# Altium PCB wallswitch.PcbDoc
Units mm, origin at the board's own origin, x right, y up, seen from the top; angles counter-clockwise.
Board outline 61 x 61 mm, 2 copper layers (Top Layer, Bottom Layer); 60 components, 71 nets, 191 pads, 137 vias.
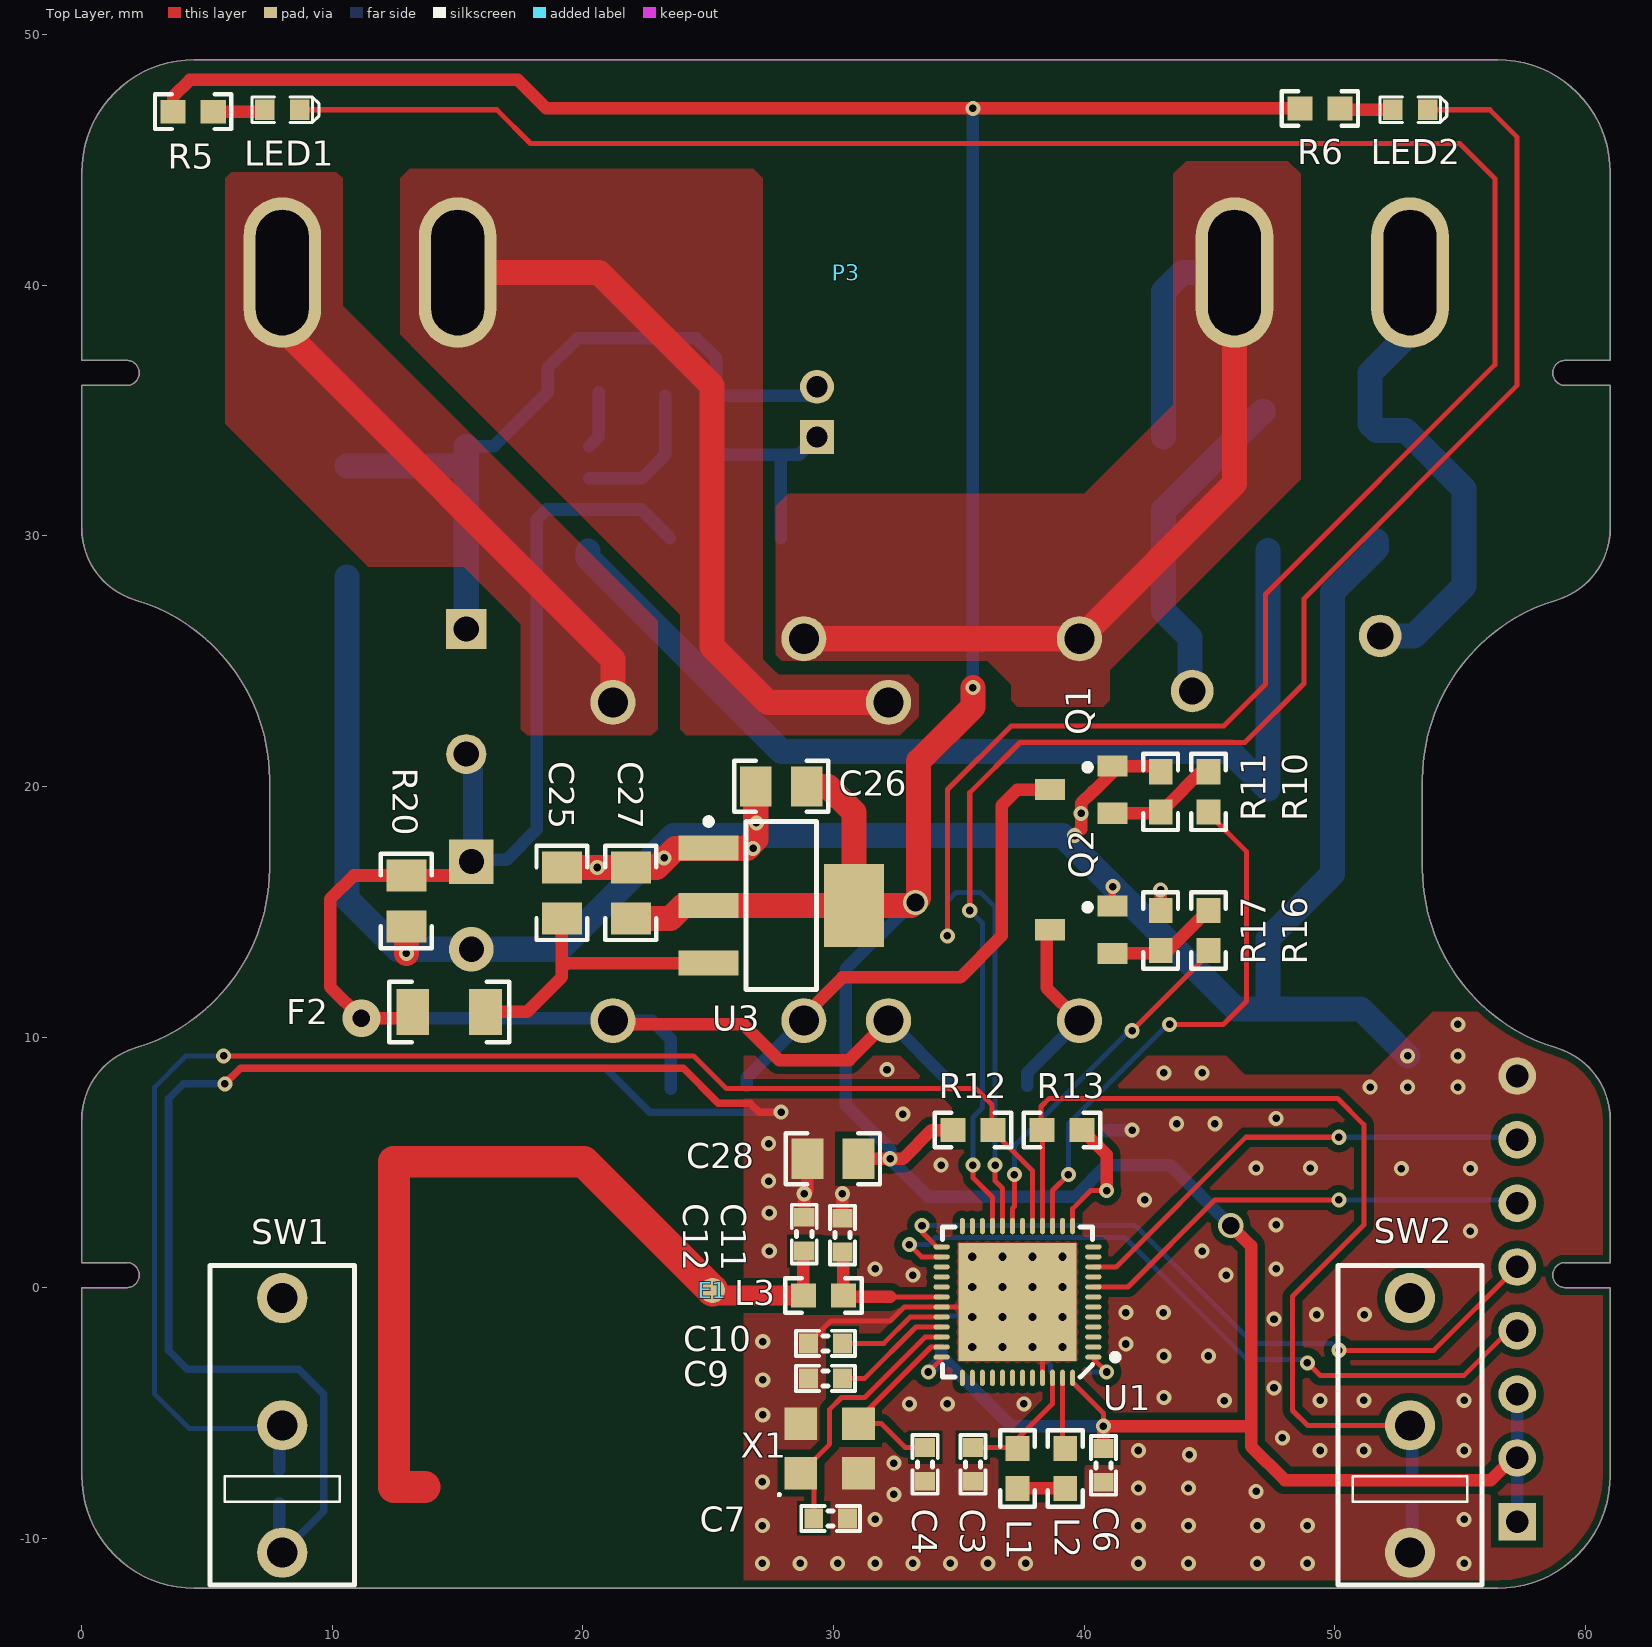
[diagram p0: Top Layer view]
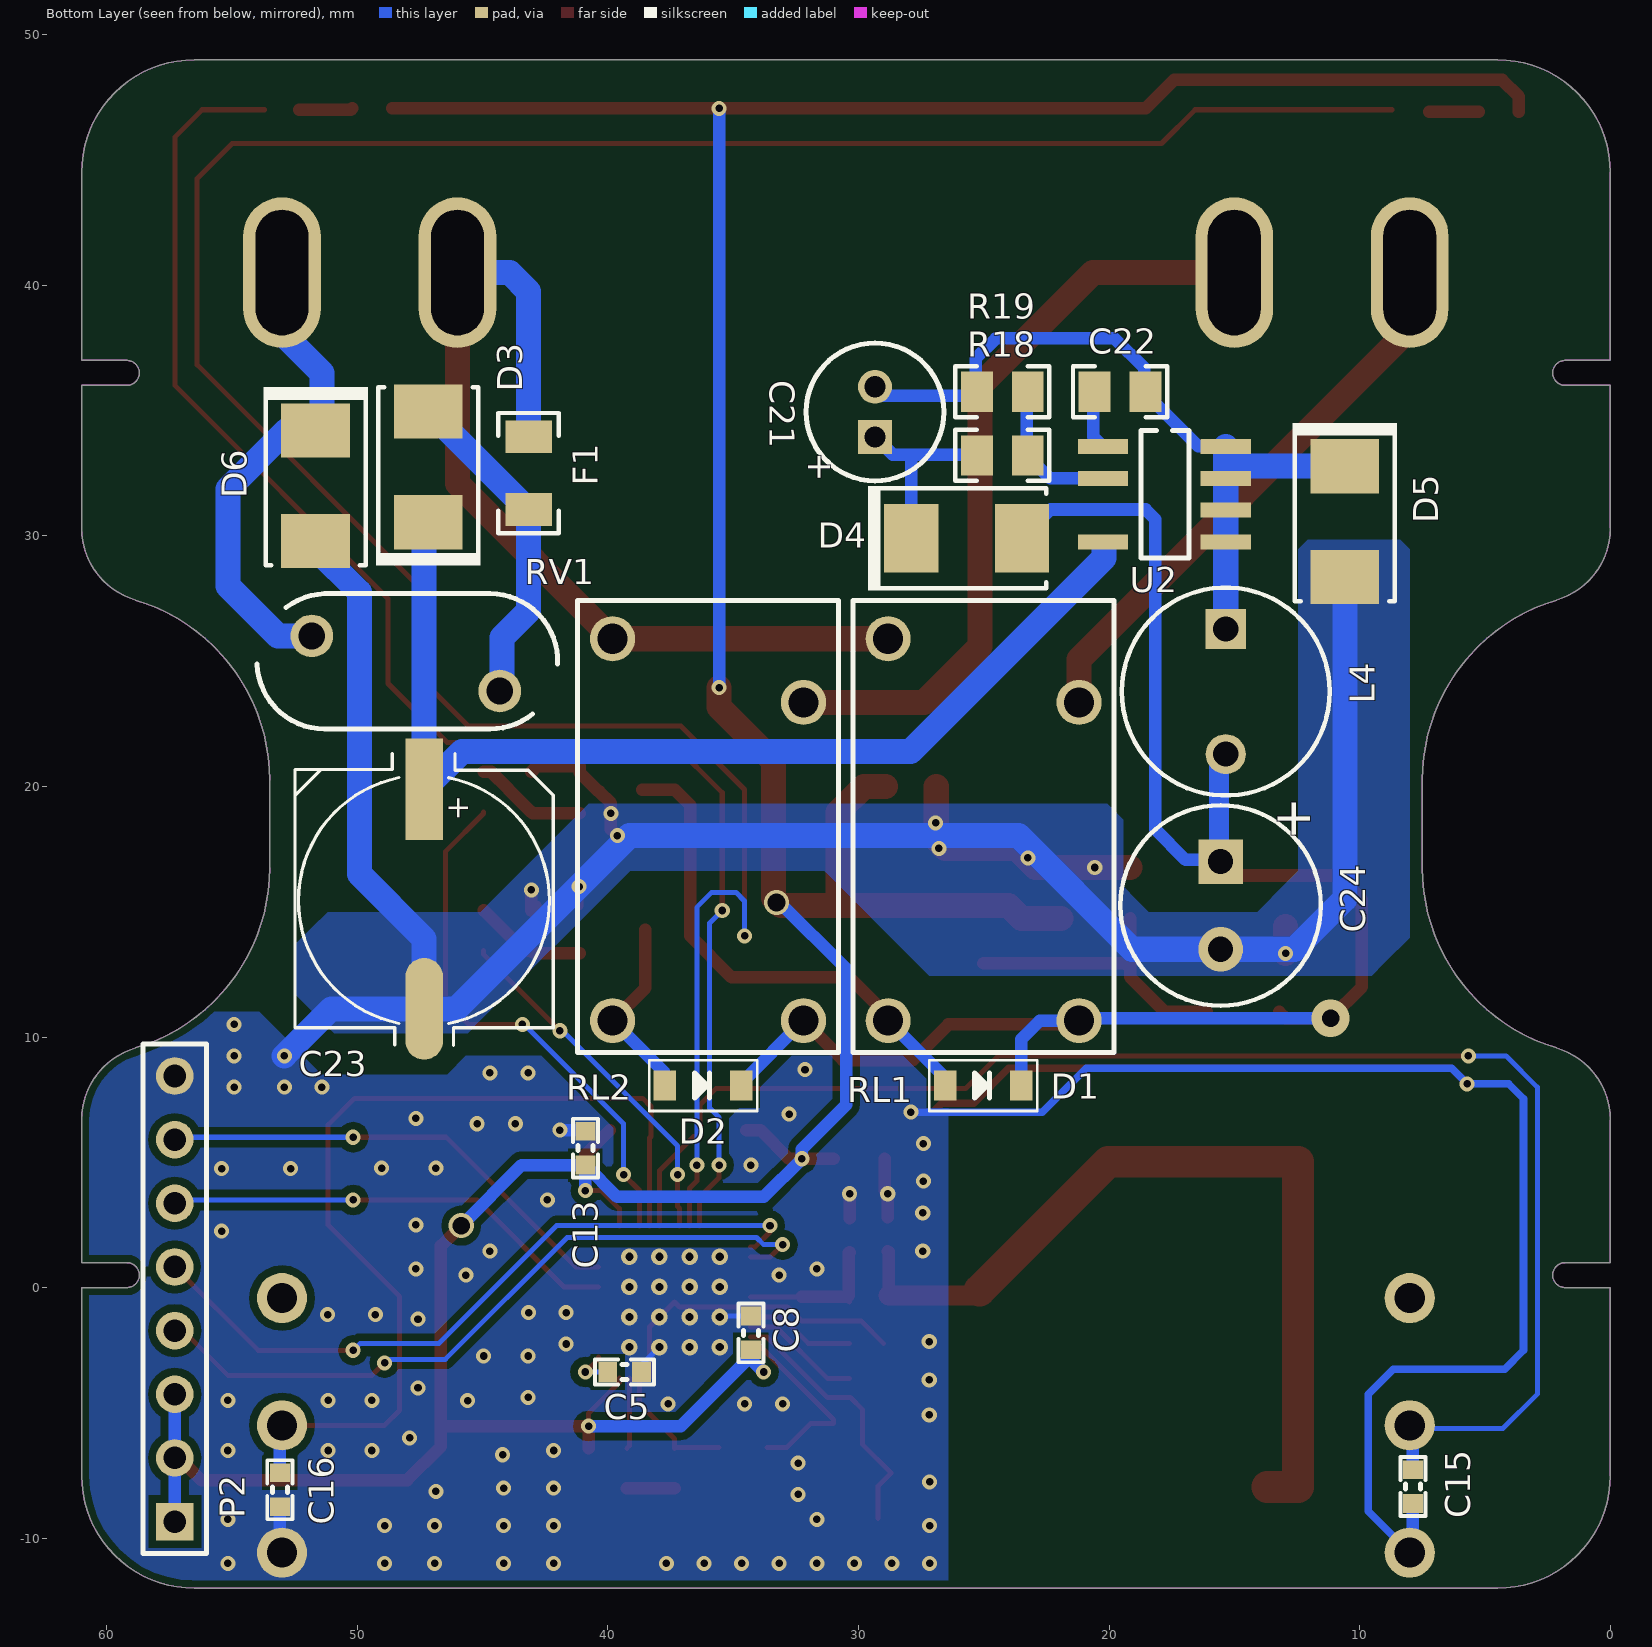
[diagram p1: Bottom Layer view, seen from below]
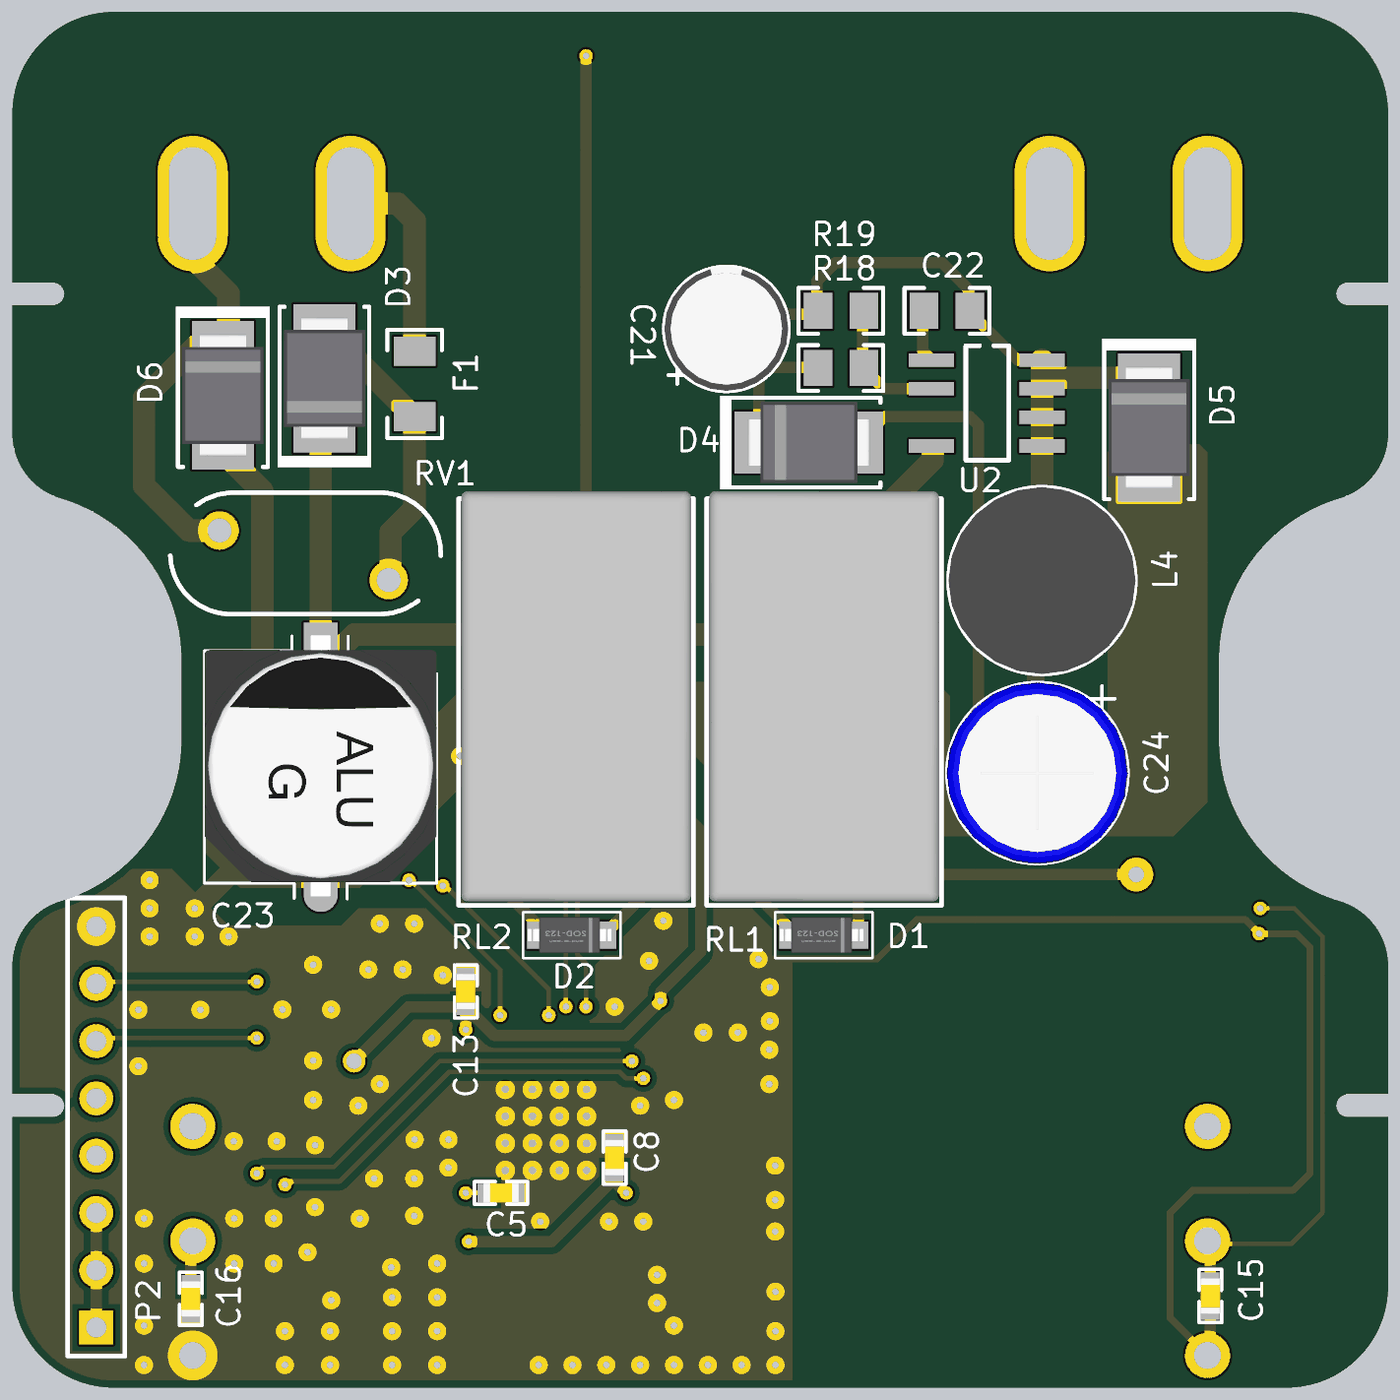
[diagram p2: 3D render of the assembled board from below, using the file's embedded part models]

## Layer stack, top to bottom
Top Solder: solder mask 0.0102, Solder Resist, Dk 3.5
Top Layer: signal copper 0.0356
Dielectric 1: dielectric 0.32, FR-4, Dk 4.8
Bottom Layer: signal copper 0.0356
Bottom Solder: solder mask 0.0102, Solder Resist, Dk 3.5

## Board outline
0,0 1.8,0 ccw(c1.8,0.5) 1.8,1 0,1 0,6.688 cw(c3,6.688) 2.143,9.563 ccw(c0,16.75) 7.5,16.75 7.5,20.25 ccw(c0,20.25) 2.143,27.437 cw(c3,30.312) 0,30.312 0,36 1.8,36 ccw(c1.8,36.5) 1.8,37 0,37 0,44.5 cw(c4.5,44.5) 4.5,49 56.5,49 cw(c56.5,44.5) 61,44.5 61,37 59.2,37 ccw(c59.2,36.5) 59.2,36 61,36 61,30.312 cw(c58,30.312) 58.857,27.437 ccw(c61,20.25) 53.5,20.25 53.5,16.75 ccw(c61,16.75) 58.857,9.563 cw(c58,6.688) 61,6.688 61,1 59.2,1 ccw(c59.2,0.5) 59.2,0 61,0 61,-7.5 cw(c56.5,-7.5) 56.5,-12 54.996,-12 10.165,-12 4.5,-12 cw(c4.5,-7.5) 0,-7.5

## Design rules (kind name [scope] priority, off if disabled: settings)
Clearance [All] p1: gap=0.2
HoleSize [All] p1: absolutevalues=TRUE maxlimit=10 minlimit=0.025 maxpercent=80.000 minpercent=20.000
MinimumSolderMaskSliver [All] p1: minsoldermaskwidth=0.01
PolygonConnect [All] p1: connectstyle=Direct reliefconductorwidth=0.254 reliefentries=4 polygonreliefangle="90 Angle" airgapwidth=0.254
RoutingVias [All] p1: holewidth=0.711 width=1.27 viastyle="Through Hole" minholewidth=0.3 minwidth=0.3 maxholewidth=5 maxwidth=5
SilkToSilkClearance [All] p1: silktosilkclearance=0.127
SilkToSolderMaskClearance [IsPad] p1: minsilkscreentomaskgap=0.01 clearancetoexposedcopper=TRUE
SolderMaskExpansion [All] p1: expansion=0.102
Width [All] p1: maxlimit=2 minlimit=0.2 preferedwidth=0.254
26 further rules are at their usual default settings.

## Classes and differential pairs
component class pca10040_sheet1_radio: C3 C4 C5 C6 C7 C8 C9 C10 C11 C12 C13 C42 C43 E1 L1 L2 L3 P2 P23 R25 R26 R27 R28 SB1 SB2 SB3 SB4 U1 X1
component class pca10040_sheet3_buttons_and_leds: C15 C16 C44 C45 C46 C47 C48 C49 C50 C51 D1 D2 LED1 LED2 Q1 Q2 R1 R2 R3 R4 R5 R6 R10 R11 R12 R13 R16 R17 R29 R30 R31 R32 R33 R34 R35 R36 R37 R38 R40 R41 R42 R43 RL1 RL2 SB5 SB6 SB7 SB8 SB30 SW1 SW2 SW5
component class pca10040_sheet5_power_supply: Bat1 C17 C18 C21 C22 C23 C24 C25 C26 C27 C28 D3 D4 D5 D6 F1 F2 L4 P3 P21 P22 R18 R19 R20 RV1 SB9 SB10 SB11 SB12 SW6 TP12 TP13 TP14 U2 U3

## Components (designator, comment, footprint, x,y, rotation, side; value= is the part's Value field where it differs from the comment)
C3 "1.0µF" CAPC1608X06L 35.565,-7.05 r90 top
C4 "12pF" CAPC1608X06L 33.66,-7.05 r270 top
C5 "100nF" CAPC1608X06L 39.335,-3.367 r180 bottom
C6 "4.7µF" CAPC1608X06L 40.772,-7.09 r270 top
C7 "12pF" CAPC1608X06L 29.89,-9.209 r0 top
C8 "100nF" CAPC1608X06L 34.295,-1.803 r90 bottom
C9 "100pF" CAPC1608X06L 29.683,-3.621 r180 top
C10 "N.C." CAPC1608X06L 29.683,-2.224 r180 top
C11 "0.8pF" CAPC1608X06L 30.358,2.094 r270 top
C12 "1.2pF" CAPC1608X06L 28.834,2.134 r90 top
C13 "100nF" CAPC1608X06L 40.899,5.563 r90 bottom
C15 "1.0µF" CAPC1608X06L 7.879,-7.939 r270 bottom
C16 "1.0µF" CAPC1608X06L 53.091,-8.066 r90 bottom
C21 "ECA-1HHG100" NHG_500x1100 29.342,34.946 r90 bottom
C22 "104" 0805_HV 19.563,35.749 r0 bottom
C23 "400AX6R8M8x11" PANACAP-G-GENERIC 47.331,15.444 r270 bottom
C24 "400AX6R8M8x11" CAPPRD350W60D800H1100 15.55,15.251 r270 bottom locked
C25 "105" 0805_HV 19.165,15.75 r270 top
C26 "105" 0805_HV 27.915,20 r0 top
C27 "105" 0805_HV 21.915,15.75 r270 top
C28 "105" 0805_HV 29.977,5.142 r0 top
D1 "Diode SMD" DIO-SMD-123 25.024,8.063 r180 bottom
D2 "Diode SMD" DIO-SMD-123 36.2,8.063 r180 bottom
D3 "US1M-13-F" SMB 47.165,32.75 r270 bottom
D4 "US1M-13-F" SMB 25.684,29.907 r0 bottom
D5 "US1M-13-F" SMB 10.597,30.567 r90 bottom
D6 "US1M-13-F" SMB 51.665,32 r90 bottom
E1 "Antenna" "PCB ANTENNE" 19.944,-1.081 r0 top
F1 "Res" 1206 43.165,32.5 r270 bottom
F2 "Res" 1206 14.665,11 r0 top
L1 "15nH" 0603 37.343,-7.215 r270 top
L2 "10µH" 0603 39.248,-7.215 r90 top
L3 "3.9nH" 0603 29.596,-0.319 r180 top
L4 "7447480331" IND_WE-TI_8095 15.347,23.786 r270 bottom
LED1 "L0603G" LED_0603_G 8.006,47.001 r180 top
LED2 "L0603G" LED_0603_G 53.015,47.001 r180 top
P2 "Header 8" HDR1X8 57.282,-9.336 r90 bottom
P3 "Header 4" CONWALL_SWITH 8.005,40.503 r0 top locked
Q1 "C1815" SOT23B 39.883,19.874 r270 top
Q2 "C1815" SOT23B 39.883,14.286 r270 top
R5 "220R" 0603 4.45,46.925 r180 top
R6 "220R" 0603 49.408,47.052 r180 top
R10 "1K" 0603 44.963,19.785 r90 top
R11 "10K" 0603 43.058,19.785 r90 top
R12 "100k" 0603 35.565,6.285 r180 top
R13 "100k" 0603 39.121,6.285 r0 top
R16 "1K" 0603 44.963,14.248 r90 top
R17 "10K" 0603 43.058,14.248 r90 top
R18 "13k" 0805_HV 24.262,33.209 r0 bottom
R19 "2K" 0805_HV 24.262,35.749 r180 bottom
R20 "3k3" 0805_HV 12.959,15.429 r90 top
RL1 "Component_1" AZ7705 28.819,23.353 r180 bottom locked
RL2 "Component_1" AZ7705 39.815,23.353 r180 bottom locked
RV1 "S10K275E2" VAR_S10K275E2 48.004,24.99 r180 bottom
SW1 "PB SW" D2FC-F-7N 8.005,-5.497 r0 top locked
SW2 "PB SW" D2FC-F-7N 53.005,-5.497 r0 top locked
U1 "nRF52832-QFAA" QFN40P600X600X90-48N 37.343,-0.573 r180 top locked
U2 "LNK306" "SOP 7" 20.247,33.565 r180 bottom locked
U3 "AMS1117-3.3V SOT223 _MH" SOT223 27.915,15.25 r270 top
X1 "CX3225SB32000D0FFFCC" SON230P260X60-4N 29.85,-6.415 r90 top

## Footprints (in the part's own frame and the unit in brackets; to place one, negate y for a bottom-side part, rotate by r counter-clockwise, add the part's x,y. Pads: shape width x height; smd on the part's side, far side on the other; paste and mask are expansions set on the pad)
0603 [mm] "0603 from SM-752 data"
  rect 1x0.95 smd: 1(-0.8,0) 2(0.8,0)
  silkscreen extent -1.52,-0.69 1.52,0.69, body extent -0.87,-0.47 0.87,0.47, height 1
0805_HV [mil] "0805 with 30mil clearance between pads"
  rect 50x63 smd: 1(-40,0) 2(40,0)
  silkscreen extent -74,-40 74,40, body extent -43,-29 43,29, height 57
1206 [mm] "1206 from SM-752 data"
  rect 1.3x1.85 smd: 1(1.45,0) 2(-1.45,0)
  silkscreen extent -2.4,-1.21 2.4,1.21, body extent -1.7,-0.9 1.7,0.9, height 1.35
AZ7705 [mm] "AZ7705"
  round 1.8 hole 1.2: 1(0,-12.7) 2(7.62,-12.7) 3(7.62,0) 4(0,2.54)
  silkscreen extent -1.4,-13.97 9.02,4.06, body extent -1.29,-13.8 8.91,4.4, height 15
CAPC1608X06L [mm]
  rect 0.75x0.8 smd: 1(-0.675,0) 2(0.675,0)
  silkscreen extent -1.17,-0.5 1.17,0.5, body extent -0.8,-0.43 0.8,0.43, height 0.8
CAPPRD350W60D800H1100 [mm] "Capacitor, Alum, 8x11mm"
  rect 1.78x1.78 hole 1: 1(-1.75,0)
  round 1.78 hole 1: 2(1.75,0)
  silkscreen extent -4,-4 4,4, body extent -4.02,-4.03 4.03,4.02, height 11.79
CONWALL_SWITH [mm]
  oval 3.1x6 hole 2.1 slot 5 at 90 deg: 1(0,0) 2(7,0) 3(38,0) 4(45,0)
D2FC-F-7N [mm] "Micro Switch – OMRON"
  round 2 hole 1.2: 1(0,-5.08) 2(0,0) 3(0,5.08)
  silkscreen extent -2.88,-6.38 2.87,6.37
DIO-SMD-123 [mm]
  rect 0.9x1.2 smd: 1(-1.524,0) 2(1.524,0)
  silkscreen extent -2.16,-1.02 2.16,1.02, body extent -1.94,-0.8 1.76,0.8, height 1.25
HDR1X8 [mm] "Connector; Header; 8 Position"
  rect 1.5x1.5 hole 0.9: 1(0,0)
  round 1.5 hole 0.9: 2(2.54,0) 3(5.08,0) 4(7.62,0) 5(10.16,0) 6(12.7,0) 7(15.24,0) 8(17.78,0)
  silkscreen extent -1.27,-1.27 19.05,1.27
IND_WE-TI_8095 [mm] "Wurth WE-TI 8095"
  rect 1.6x1.6 hole 1: 1(-2.5,0)
  round 1.6 hole 1: 2(2.5,0)
  silkscreen extent -4.15,-4.15 4.15,4.15, body extent -4.15,-4.15 4.15,4.15, height 10
LED_0603_G [mil]
  rect 30x32 smd: 1(-27.5,0) 2(27.5,0)
  silkscreen extent -58,-20 48,20, body extent -32,-16 32,16, height 24
NHG_500x1100 [mm] "TH, 2-Leads, Dia 5mm,  Lead Spacing 2mm"
  rect 1.35x1.35 hole 0.85: 1(-1,0)
  round 1.35 hole 0.85: 2(1,0)
  silkscreen extent -2.75,-2.75 2.75,2.75, body extent -2.75,-2.75 2.75,2.75, height 12.51
PANACAP-G-GENERIC [mil]
  rect 160x59.06 smd: 1(-175,0)
  oval 160x59.06 smd: 2(170,0)
  silkscreen extent -231,-203 227,203, body extent -233,-203 223,203, height 402
"PCB ANTENNE" [mm]
  round 1 smd: 1(5.225,0.971)
  Top Layer lines w0.762: -7.731,-6.825 -7.477,-6.851 ; 5.2,0.907 5.2,0.945
  Top Layer lines w1.27: -7.477,-6.876 -6.251,-6.876 ; -7.477,-6.851 -7.477,6.103 0.092,6.103 ; 5.225,0.971 0.092,6.103 ; 0.092,6.103 0.093,6.103
QFN40P600X600X90-48N [mm]
  oval 0.65x0.2 smd: 1(-3.025,2.2) 2(-3.025,1.8) 3(-3.025,1.4) 4(-3.025,1) 5(-3.025,0.6) 6(-3.025,0.2) 7(-3.025,-0.2) 8(-3.025,-0.6) 9(-3.025,-1) 10(-3.025,-1.4) 11(-3.025,-1.8) 12(-3.025,-2.2) 25(3.025,-2.2) 26(3.025,-1.8) 27(3.025,-1.4) 28(3.025,-1) 29(3.025,-0.6) 30(3.025,-0.2) 31(3.025,0.2) 32(3.025,0.6) 33(3.025,1) 34(3.025,1.4) 35(3.025,1.8) 36(3.025,2.2)
  oval 0.2x0.65 smd: 13(-2.2,-3.025) 14(-1.8,-3.025) 15(-1.4,-3.025) 16(-1,-3.025) 17(-0.6,-3.025) 18(-0.2,-3.025) 19(0.2,-3.025) 20(0.6,-3.025) 21(1,-3.025) 22(1.4,-3.025) 23(1.8,-3.025) 24(2.2,-3.025) 37(2.2,3.025) 38(1.8,3.025) 39(1.4,3.025) 40(1,3.025) 41(0.6,3.025) 42(0.2,3.025) 43(-0.2,3.025) 44(-0.6,3.025) 45(-1,3.025) 46(-1.4,3.025) 47(-1.8,3.025) 48(-2.2,3.025)
  rect 4.7x4.7 smd: 49(0,0)
  silkscreen extent -4.03,-3 3,3, body extent -3.02,-3.02 3.02,3.02, height 0.86
SMB [mm] "Molded Diode, 2-Leads, Body 5.4x3.6mm, IPC Medium Density, based on OnSemi component dimensions"
  rect 2.159x2.743 smd: 1(2.21,0) 2(-2.21,0)
  silkscreen extent -3.18,-2.08 3.94,2.08, body extent -2.7,-1.8 2.7,1.8, height 2.32
SON230P260X60-4N [mm] "SON, 4-Leads, Body 3.25x2.55mm, Pitch 2.30mm, IPC Medium Density"
  rect 1.3x1.3 smd: 1(-0.985,1.15) 2(-0.985,-1.15) 3(0.985,-1.15) 4(0.985,1.15)
  silkscreen extent -1.9,1.96 -1.8,2.06, body extent -1.3,-1.65 1.3,1.65, height 0.6
"SOP 7" [mm]
  rect 2x0.6 smd: 1(0,0) 2(0,-1.27) 4(0,-3.81) 5(4.9,-3.81) 6(4.9,-2.54) 7(4.9,-1.27) 8(4.9,0)
  silkscreen extent 1.52,-4.45 3.43,0.63
SOT23B [mm] "SOT 23B"
  rect 0.85x1.2 smd: 1(0.95,1.25) 2(0,-1.25) 3(-0.94,1.245)
  silkscreen extent -1.02,0.13 -0.77,0.38, body extent -1.5,-1.2 1.5,1.3, height 1.06
SOT223 [mm]
  rect 1x2.4 smd: 1(-2.3,-2.9) 2(0,-2.9) 3(2.3,-2.9)
  rect 3.3x2.4 smd: 4(0,2.9)
  silkscreen extent -3.47,-3.02 3.35,1.4, body extent -3.25,-3.56 3.25,3.4, height 1.68
VAR_S10K275E2 [mm] "EPCOS"
  round 1.7 hole 1.067: 1(-3.81,1.016) 2(3.69,-1.184)
  silkscreen extent -6,-2.7 6,2.7, body extent -6.02,-2.7 5.98,2.7, height 15

## Part data
C3: library part C0603-1µ0, "Capacitor, X7R, ±10%"
C4 C7: library part C0402-12p, "Capacitor, NP0, ±2%"
C5 C8 C13: library part C0402-100n, "Capacitor, X7R, ±10%"
C6: library part C0603-4µ7, "Capacitor, X5R, ±10%"
C9: library part C0402-100p, "Capacitor, NP0, ±5%"
C10: library part C0402-N.C., "Not mounted"
C11: library part C0402-0.8p, "Capacitor, NP0, ±5%"
C12: library part C0402-1.2p, "Capacitor, NP0, ±0.1pF"
C15 C16: library part C0402-1µ0, "Capacitor, X5R, ±5%"
C21: "CAP, AL, 10 µF, 50 V, +/- 20%, TH"
C22 C25 C26 C27 C28: library part CM, "Cap SMD"
C23 C24: "CAP, AL, 6.8uF, 400V, +/-20%, TH"
D1 D2: "Default Diode"
D3 D4 D5 D6: library part MURS160-13-F, "Diode, Ultrafast, 600V, 1A, SMB"
E1: "Generic Antenna"
F1 F2: library part Res-SMD, "Resistor"
L1: library part L0402-15n, "Inductor, 320mA, ±5%"
L2: library part L0603-10µ, "Inductor, 80mA, ±10%"
L3: library part L0402-3n9, "Inductor, 170mA, ±0.1nH"
L4: "Inductor, Wirewound, Ferrite, 330 µH, 1.4 A, 0.3 ohm, TH"
LED1 LED2: library part "LG L29K Smartled Green", "LED SMARTLED GREEN 570NM 0603"
P2: "Header, 8-Pin"
P3: "Header, 4-Pin"
Q1 Q2: "NPN 600mW, ECB"
R5 R6: library part R0402-220, "Resistor, ±1%, 0.063W"
R10 R11 R16 R17 R18 R19 R20: library part R, "Resistor 1/4W"
R12 R13: library part R0402-100k, "Resistor, ±1%, 0.063W"
RV1: "Varistor 275V RMS 10MM Radial, TH"
SW1 SW2: library part Switch-PB-6.2x6.3mm-SMD, "Tactile Switch, SPNO, SMD, 160gf, 6.2x6.3x2.5mm"
U1: "Multi-protocol Bluetooth Low Energy and 2.4GHz proprietary system-on-chip"
U2: library part Component_1
X1: library part XTAL_SMD2016_32MHz_8pF_Epson, "XTAL SMD 2016, 32MHz, Cl=8pF, Tol: ±10ppm, Stab: ±10ppm"

## Via types
v1: diameter 0.6, hole 0.3, Top Layer to Bottom Layer, 118 vias
v2: diameter 0.66, hole 0.33, Top Layer to Bottom Layer, 16 vias
v3: diameter 1, hole 0.7, Top Layer to Bottom Layer, 2 vias
v4: diameter 1.5, hole 0.7, Top Layer to Bottom Layer, 1 vias

## Nets (pads, with @x,y where several pads share a name; then routed paths per layer and width w, separated by ;. In a path a pad name is that pad's centre, name@x,y a point inside that pad or via, vN(x,y) a via of type N, cw(c..) or ccw(c..) an arc to the next point about the centre after c; other vN are vias at no path point)
ANT: C12.1 E1.1 L3.2 | length 5.5
  Top Layer w0.5: E1.1 E1.1@25.378,-0.319 ; L3.2 28.796,1.421 C12.1
  Top Layer w0.8: E1.1@25.378,-0.319 L3.2
BOOT: 
BP: C22.2 U2.1 | length 2.3
  Bottom Layer w0.5: U2.1 20.63,33.948 C22.2@20.63,35.724
BUTTON1: C15.1 R12.1 SW1.2 U1.17 | length 59.8
  Top Layer w0.2: v1(5.665,9.25) 24.415,9.25 25.729,7.936 35.692,7.936 36.327,7.301 36.327,6.031 36.581,6.031 37.943,4.669 U1.17
  Bottom Layer w0.2: v1(5.665,9.25) 4.165,9.25 2.915,8 2.915,-4.25 4.288,-5.623 SW1.2@7.879,-5.623
  Bottom Layer w0.5: C15.1 SW1.2@7.879,-5.623
BUTTON2: C16.2 R13.1 SW2.2 U1.16 | length 37.7
  Top Layer w0.2: U1.16 38.343,5.971 38.283,6.031 38.283,7.225 38.613,7.555 50.11,7.555 51.165,6.5 51.165,2.5 48.315,-0.35 48.315,-4.9 48.912,-5.497 SW2.2
  Bottom Layer w0.2: SW2.2 SW2.2@53.091,-5.583
  Bottom Layer w0.5: C16.2 SW2.2@53.091,-5.583
CTS: 
DEC1: C5.1 U1.1 | length 1.7
  Top Layer w0.2: U1.1 40.368,-2.836 v1(40.899,-3.367)
  Bottom Layer w0.2: C5.1 v1(40.899,-3.367)
DEC2: C10.1 U1.32 | length 4.4
  Top Layer w0.2: C10.1 32.009,-2.224 33.06,-1.173 U1.32
DEC3: C9.1 U1.33 | length 4.8
  Top Layer w0.2: C9.1 31.247,-3.621 33.295,-1.573 U1.33
DEC4: C3.2 L1.1 U1.46 | length 5.2
  Top Layer w0.2: C3.2 37.303,-6.375 L1.1 37.343,-6.034 38.743,-4.634 U1.46
FB: R18.1 R19.2 U2.2 | length 5.8
  Bottom Layer w0.5: U2.2 22.357,32.295 23.297,33.234 R19.2@23.297,35.597
GND: C3.1 C4.2 C5.2 C6.2 C7.2 C8.2 C9.2 C10.2 C11.1 C12.2 C13.2 C15.2 C16.1 C23.2 C24.2 C25.1 C26.1 C27.1 C28.1 D5.2 D6.2 P2.8 Q1.3 Q2.3 R11.2 R17.2 R20.1 SW1.1 SW2.1 U1.31 U1.45 U1.49 U3.1 X1.2 X1.4 | length 197.4
  Top Layer w0.2: C10.2 29.897,-1.335 32.263,-1.335 32.825,-0.773 U1.31 37.143,-0.773 U1.49 v2(37.943,-1.173) 38.343,-1.573 U1.45
  Top Layer w0.3: v1(5.715,8.128) 6.35,8.763 24.003,8.763 25.4,7.366 26.67,7.366 27.036,7 v1(27.915,7) ; Q2.3 41.128,15.982 v1(41.148,16.002)
  Top Layer w0.5: C12.2 v1(28.834,3.745) 28.961,3.872 C28.1 ; C11.1 v1(30.358,3.745) ; v1(39.624,18.034) 39.883,18.293 39.883,19.335 40.347,19.799 40.373,19.799 41.128,20.554 Q1.3 42.829,20.814 R11.2 ; R17.2@42.88,15.226 R17.2 43.058,15.87 v1(43.053,15.875)
  Top Layer w1: v1(12.954,13.335) 12.959,13.34 R20.1 ; C24.2 C24.2@15.55,13.899 ; C25.1 C27.1 22.931,16.766 23.691,17.526 26.543,17.526 26.899,17.882 C26.1
  Bottom Layer w0.2: SW1.1@7.879,-10.451 SW1.1 ; C8.2 35.498,-1.128 v2(35.543,-1.173) ; v2@37.793,1.377 v2(37.943,1.227) ; v2(37.943,-2.373) 38.66,-3.09 C5.2 ; SW2.1 SW2.1@53.091,-10.491
  Bottom Layer w0.3: SW1.1 9.665,-8.917 9.665,-4.25 8.665,-3.25 4.215,-3.25 3.465,-2.5 3.465,7.529 4.064,8.128 v1(5.715,8.128) 6.337,8.75 20.915,8.75 22.665,7 v1(27.915,7)
  Bottom Layer w0.5: SW1.1@7.879,-10.451 C15.2 ; C13.2 40.946,6.285 v1(41.915,6.285) ; SW2.1@53.091,-10.491 C16.1
  Bottom Layer w1: D5.2 10.597,15.505 12.601,13.501 C24.2 19.089,13.501 23.622,18.034 39.131,18.034 46.039,11.126 C23.2 ; D6.2 51.665,29.5 49.915,27.75 49.915,16.5 47.331,13.916 C23.2 ; v1(52.915,9.25) 51.039,11.126 C23.2
  other v1: 27.165,-11 28.665,-11 30.165,-11 31.665,-11 33.165,-11 34.665,-11 36.165,-11 37.665,-11 42.165,-11 44.165,-11 46.915,-11 48.915,-11 55.165,-11 27.165,-9.5 42.165,-9.5 44.165,-9.5 46.915,-9.5 48.915,-9.5 31.665,-9.25 55.165,-9.25 32.415,-8.25 46.863,-8.128 42.165,-8 44.165,-8 27.165,-7.75 32.415,-7 44.201,-6.669 42.165,-6.5 49.415,-6.5 51.165,-6.5 55.165,-6.5 47.915,-6 27.178,-5.08 33.025,-4.637 34.549,-4.637 37.597,-4.637 45.598,-4.507 49.415,-4.5 51.165,-4.5 55.165,-4.5 43.185,-4.38 47.579,-3.999 27.178,-3.683 43.185,-2.729 44.963,-2.729 41.665,-2.25 27.178,-2.159 47.579,-1.256 49.281,-1.081 51.186,-1.081 41.665,-1 43.165,-1 33.165,0.5 45.665,0.5 31.665,0.75 47.665,0.75 27.437,1.459 44.709,1.459 55.415,2.25 47.665,2.5 27.437,2.983 42.415,3.5 27.415,4.25 46.868,4.764 49.027,4.764 52.665,4.75 55.415,4.75 34.295,4.888 27.415,5.75 43.693,6.539 45.217,6.539 47.665,6.75 32.771,6.92 51.415,8 52.915,8 54.915,8 43.185,8.571 44.709,8.571 32.136,8.698 54.915,9.25 54.915,10.5 20.574,16.764 23.241,17.145 26.797,17.526 26.924,18.542 39.878,18.923
  other v2: 35.543,-2.373 36.743,-2.373 39.143,-2.373 36.743,-1.173 39.143,-1.173 35.543,0.027 36.743,0.027 37.943,0.027 39.143,0.027 35.543,1.227 36.743,1.227 39.143,1.227
L: F1.2 P3.3 RL1.4 RL2.4 | length 37.1
  Top Layer w1: RL1.4 RL2.4 46.005,32.083 P3.3
  Bottom Layer w1: F1.2 43.165,39.75 43.918,40.503 P3.3
L1: P3.2 RL2.3 | length 30.4
  Top Layer w1: P3.2 20.651,40.503 25.151,36.003 25.151,25.589 27.387,23.353 RL2.3
L2: P3.1 RL1.3 | length 22.6
  Top Layer w1: P3.1 8.005,38.265 21.199,25.071 RL1.3
LED1: LED1.1 U1.20 | length 109.6
  Top Layer w0.2: LED1.1 16.566,47.001 17.912,45.655 54.996,45.655 56.392,44.259 56.392,36.82 47.249,27.677 47.249,24.084 45.579,22.414 37.089,22.414 34.549,19.874 v1(34.549,14.032) ; v1(36.454,4.888) 36.454,4.253 36.743,3.964 U1.20
  Bottom Layer w0.2: v1(34.549,14.032) 34.549,15.429 34.892,15.772 35.857,15.772 36.454,15.175 v1(36.454,4.888)
LED2: LED2.1 U1.21 | length 62.5
  Top Layer w0.2: v1(35.438,15.048) 35.438,19.747 37.441,21.75 46.415,21.75 48.773,24.108 48.773,27.494 57.282,36.003 57.282,45.909 56.19,47.001 LED2.1 ; v1(35.565,4.888) 35.565,4.38 36.343,3.602 U1.21
  Bottom Layer w0.2: v1(35.438,15.048) 35.946,14.54 35.946,7.174 35.565,6.793 v1(35.565,4.888)
N: D6.1 P3.4 RV1.1 | length 19.6
  Bottom Layer w1: RV1.1 53.171,26.006 55.165,28 55.165,31.874 52.829,34.21 D6.1 51.415,34.46 51.415,36.5 53.005,38.09 P3.4
NetC11_2: C11.2 L3.1 U1.30 | length 6
  Top Layer w0.2: L3.1@30.358,-0.573 L3.1@30.558,-0.373 ; L3.1@30.377,-0.338 30.358,-0.319 L3.1 ; 32.263,-0.373 U1.30
  Top Layer w0.5: C11.2 30.396,1.381 L3.1 30.45,-0.373 30.558,-0.373 32.263,-0.373
NetC21_1: C21.1 D4.1 R18.2 | length 7.7
  Bottom Layer w0.5: R18.2@25.329,33.234 27.818,33.234 ; D4.1 27.894,33.158 27.818,33.234 ; C21.1 28.631,33.234 27.818,33.234
NetC25_2: C25.2 F2.1 U3.3 | length 11.9
  Top Layer w0.5: F2.1 17.765,11 19.165,12.4 19.165,12.75 ; C25.2 19.165,12.75 ; U3.3 19.365,12.95 19.165,12.75
NetD1_1: D1.1 Q1.2 RL1.1 | length 20.3
  Top Layer w0.5: RL1.1 28.819,10.845 30.358,12.384 35.06,12.384 36.708,14.032 36.708,19.239 37.343,19.874 Q1.2
  Bottom Layer w0.5: D1.1 26.548,8.382 RL1.1
NetD2_1: D2.1 Q2.2 RL2.1 | length 7.6
  Top Layer w0.5: Q2.2@38.506,14.286 38.506,11.962 RL2.1
  Bottom Layer w0.5: D2.1 37.724,8.562 RL2.1
NetD3_2: D3.2 F1.1 RV1.2 | length 13.3
  Bottom Layer w1: RV1.2 44.23,23.89 44.23,25.935 43.165,27 F1.1 43.215,31.05 47.125,34.96 D3.2
NetL1_2: L1.2 L2.1 | length 1.9
  Top Layer w0.5: L1.2 L2.1
NetL2_2: L2.2 U1.47 | length 2.9
  Top Layer w0.2: U1.47 39.143,-6.31 L2.2
NetLED1_2: LED1.2 R5.1 | length 2.1
  Top Layer w0.2: LED1.2@7.231,46.925 LED1.2
  Top Layer w0.5: R5.1 LED1.2@7.231,46.925
NetLED2_2: LED2.2 R6.1 | length 2.1
  Top Layer w0.5: R6.1 50.259,47.001 LED2.2
NetQ1_1: Q1.1 R10.2 R11.1 | length 4.5
  Top Layer w0.5: Q1.1 42.997,18.924 R11.1 43.069,18.985 43.983,19.899 43.983,19.91 44.658,20.585 R10.2
NetQ2_1: Q2.1 R16.2 R17.1 | length 4.5
  Top Layer w0.5: Q2.1 42.946,13.336 R17.1 43.352,13.448 44.952,15.048 R16.2
NFC1: 
NFC2: 
P0.00: U1.2
P0.01: U1.3
P0.02: U1.4
P0.03: U1.5
P0.04: U1.6
P0.05: U1.7
P0.06: P2.6 U1.8 | length 18.4
  Top Layer w0.2: U1.8 41.753,0.027 45.226,3.5 v1(50.165,3.5)
  Bottom Layer w0.2: v1(50.165,3.5) 57.146,3.5 P2.6
P0.07: U1.9
P0.08: P2.7 U1.10 | length 19.1
  Top Layer w0.2: U1.10 40.759,0.827 40.762,0.824 41.28,0.824 46.456,6 v1(50.165,6)
  Bottom Layer w0.2: v1(50.165,6) 57.186,6 P2.7
P0.09: 
P0.09/NFC1: U1.11
P0.10: 
P0.10/NFC2: U1.12
P0.11: U1.14
P0.12: R10.1 U1.15 | length 21.8
  Top Layer w0.2: U1.15 38.743,3.875 v1(39.375,4.507) ; v1(43.415,10.5) 45.552,10.5 46.487,11.435 46.487,17.394 44.963,18.918 R10.1
  Bottom Layer w0.2: v1(39.375,4.507) 39.375,6.539 43.415,10.579 v1(43.415,10.5)
P0.15: U1.18
P0.16: R16.1 U1.19 | length 14.3
  Top Layer w0.2: U1.19 37.143,3.164 37.216,3.237 v1(37.216,4.507) ; v1@41.915,10.25 44.963,13.298 R16.1
  Bottom Layer w0.2: v1(37.216,4.507) 37.216,5.65 41.816,10.25 v1(41.915,10.25)
P0.19: U1.22
P0.20: U1.23
P0.21: U1.24
P0.22: U1.27
P0.23: U1.28
P0.24: U1.29
P0.25: U1.37
P0.26: U1.38
P0.27: U1.39
P0.28: U1.40
P0.29: U1.41
P0.30: U1.42
P0.31: U1.43
RTS: 
S: C21.2 C22.1 D5.1 L4.1 R19.1 U2.5 U2.6 U2.7 U2.8 | length 30.4
  Bottom Layer w0.5: U2.8 16.439,33.565 18.598,35.724 18.598,36.689 19.792,37.883 24.516,37.883 25.329,37.07 25.329,35.597 28.993,35.597 C21.2
  Bottom Layer w1: D5.1 15.296,32.777 15.347,32.828 ; L4.1 U2.5 U2.6 U2.7 15.347,32.828 ; U2.8 15.347,32.828
SWDCLK: P2.5 U1.25 | length 28.5
  Top Layer w0.2: v1(33.533,2.475) 33.533,2.221 34.127,1.627 U1.25 ; v1(50.165,-2.5) 53.958,-2.5 P2.5
  Bottom Layer w0.2: v1(33.533,2.475) 42.042,2.475 46.741,-2.224 49.889,-2.224 v1(50.165,-2.5)
SWDIO: P2.4 U1.26 | length 28.9
  Top Layer w0.2: v1(33.025,1.713) 33.511,1.227 U1.26 ; v1(48.915,-3) 49.415,-3.5 55.165,-3.5 56.949,-1.716 P2.4
  Bottom Layer w0.2: v1(33.025,1.713) 33.787,1.713 34.074,2 41.628,2 46.487,-2.859 48.774,-2.859 v1(48.915,-3)
VCC_RELAY: C24.1 D1.2 D2.2 D4.2 F2.2 L4.2 R20.2 RL1.2 RL2.2 | length 69.9
  Top Layer w0.5: F2.2 12.965,10.75 v4(11.165,10.75) 9.915,12 9.915,15.5 10.86,16.445 R20.2 14.994,16.445 C24.1 ; RL1.2 21.352,10.5 26.415,10.5 27.836,9.079 30.621,9.079 RL2.2
  Bottom Layer w0.5: v4@11.359,10.75 21.102,10.75 RL1.2 22.762,10.653 23.5,9.915 D1.2 D1.2@23.5,7.936 ; C24.1 15.621,17.072 16.945,17.072 18.166,18.293 18.166,30.669 18.547,31.05 22.331,31.05 D4.2 ; RL2.2 34.676,8.172 D2.2
  Bottom Layer w0.8: L4.2 15.621,21.011 C24.1@15.621,17.072
VDD_NRF: C6.1 C8.1 C13.1 C26.2 C27.2 C28.2 P2.1 P2.2 P2.3 R5.2 R6.2 R12.2 R13.2 U1.13 U1.36 U1.48 U3.2 U3.4 | length 179.1
  Top Layer w0.2: v1(33.787,-3.367) 34.318,-2.836 U1.36 ; U1.48 39.543,-3.789 40.772,-5.018 v1(40.772,-5.526) ; U1.13 39.543,3.151 40.264,3.872 v1(40.899,3.872)
  Top Layer w0.5: R5.2 3.65,47.522 4.323,48.195 17.404,48.195 18.547,47.052 v1(35.565,47.052) R6.2 ; C28.2 v1(32.263,5.142) 32.771,5.142 33.914,6.285 R12.2@34.473,6.285 ; R13.2 40.899,5.307 v1(40.899,3.872) ; C6.1 v1(40.772,-5.526) 46.665,-5.526 ; v3(45.852,2.475) 46.665,1.662 46.665,-5.526 ; P2.2 57.119,-6.796 56.23,-7.685 48.011,-7.685 46.665,-6.339 46.665,-5.526
  Top Layer w1: C27.2 23.497,14.734 24.013,15.25 U3.2 U3.4 30.815,18.969 29.784,20 C26.2 ; U3.4@30.915,15.25 33.1,15.25 33.401,15.551 33.401,21.012 35.565,23.176 v1(35.565,23.938)
  Bottom Layer w0.2: 34.295,-2.859 C8.1@34.295,-2.732
  Bottom Layer w0.5: v3(33.274,15.367) 33.147,15.367 30.485,12.705 30.485,7.301 32.263,5.523 v1(32.263,5.142) 33.787,3.618 39.629,3.618 C13.1 ; v1(33.787,-3.367) 34.295,-2.859 ; C8.1 34.295,-2.732 37.089,-5.526 v1(40.772,-5.526) ; v1(35.565,23.938) v1(35.565,47.052) ; v1(40.899,3.872) C13.1 ; v3(45.852,2.475) 43.439,4.888 C13.1 ; P2.1 P2.2 P2.3
VIN1: C23.1 D3.1 U2.4 | length 40.8
  Bottom Layer w1: 20.198,29.399 20.198,29.12 27.92,21.398 45.822,21.398 C23.1 47.331,29.416
XC1: C7.1 U1.34 X1.1 | length 10.7
  Top Layer w0.2: C7.1 29.215,-7.915 X1.1 29.85,-6.25 29.85,-4.856 30.323,-4.383 31.247,-4.383 33.657,-1.973 U1.34
XC2: C4.1 U1.35 X1.3 | length 7.7
  Top Layer w0.2: C4.1 32.858,-6.375 31.913,-5.43 X1.3 31,-5.265 33.892,-2.373 U1.35
pads on no net: SW1.3 SW2.3 U1.44

## Polygon pours and split planes (outlines as drawn)
GND on Top Layer "Bottom Layer-No Net" (solid, remove dead copper, pour order 13): 26.415,-11.753 57.501,-11.753 57.61,-11.644 57.728,-11.761 57.947,-11.761 58.399,-11.761 58.755,-11.405 60.415,-9.745 60.415,-9.5 60.415,-9.477 60.666,-9.226 60.971,-8.921 60.971,-8.089 60.971,-0.029 61,0 58.915,0 58.729,0.186 58.729,0.305 58.729,0.461 58.69,0.5 58.71,0.519 58.71,0.598 58.71,0.703 58.922,0.916 59.016,1.01 59.2,1.01 60.99,1.01 61,1 61,6.688 60.862,6.826 60.862,7.618 60.822,7.618 60.486,7.954 60.558,8.027 60.558,8.255 60.558,8.386 60.128,8.816 59.698,9.246 59.568,9.246 59.056,9.246 58.689,9.613 58.642,9.66 57.98,9.66 57.98,9.743 57.741,9.982 57.223,10.5 56.415,10.5 56.415,10.75 56.165,11 53.915,11 51.415,8.5 46.415,8.5 45.665,9.25 42.519,9.25 39.681,6.412 39.368,6.099 37.665,6.099 35.816,6.099 34.915,7 32.665,9.25 31.415,9.25 26.601,9.25 26.415,9.25
L on Top Layer "Bottom Layer-No Net" (solid, remove dead copper, pour order 11): 27.691,26.732 27.691,31.177 28.199,31.685 34.676,31.685 40.01,31.685 41.28,32.955 44.201,35.876 46.005,35.876 46.005,32.083 41.406,27.484 41.406,25.009 41.026,24.629 41.026,23.557 41.026,23.43 40.772,23.176 39.629,23.176 37.343,23.176 37.089,23.43 37.089,24.065 36.2,24.954 36.073,25.081 29.723,25.081
L1 on Top Layer "Bottom Layer-No Net" (solid, remove dead copper, pour order 10): 12.705,44.258 12.705,40.067 12.705,38.035 13.594,37.146 23.881,26.859 23.881,24.573 23.881,22.287 24.135,22.033 25.532,22.033 32.644,22.033 33.279,22.668 33.406,22.795 33.406,23.938 33.406,24.065 33.025,24.446 32.009,24.446 27.818,24.446 27.564,24.7 27.183,25.081 27.183,26.859 27.183,44.258 26.802,44.639 26.675,44.639 13.086,44.639 12.705,44.258
L2 on Top Layer "Bottom Layer-No Net" (solid, pour order 9): 5.72,39.686 5.72,34.479 8.387,31.812 11.435,28.764 15.753,28.764 15.753,32.574 12.07,36.257 8.006,40.321 6.482,40.321
L2 on Top Layer "Bottom Layer-No Net" (solid, pour order 8): 5.72,44.258 5.72,40.194 5.72,38.289 16.896,27.113 17.531,26.478 17.531,23.176 17.531,22.287 17.785,22.033 18.293,22.033 22.738,22.033 22.865,22.16 22.992,22.287 22.992,23.557 22.992,26.605 20.198,29.399 10.419,39.178 10.419,43.75 10.419,44.258 10.165,44.512 5.974,44.512 5.72,44.258
L on Top Layer "Bottom Layer-No Net" (solid, pour order 14): 27.69,26.279 27.69,27.549 27.69,27.803 27.944,28.057 28.071,28.184 28.833,28.184 39.374,28.184 41.66,30.47 43.565,32.375 43.565,39.233 43.565,44.44 44.073,44.948 45.343,44.948 48.137,44.948 48.645,44.44 48.645,42.281 48.645,32.248 41.533,25.136 41.406,25.009 34.04,25.009 27.944,25.009 27.69,25.263
GND on Bottom Layer "Bottom Layer-No Net" (solid, remove dead copper, pour order 11): 25.654,19.304 20.955,19.304 20.066,19.304 19.431,18.669 19.431,15.875 19.431,14.986 20.32,14.097 20.574,13.843 26.924,13.843 26.924,14.986 29.083,17.145
GND on Bottom Layer "Bottom Layer-No Net" (solid, remove dead copper, pour order 9): 12.065,29.845 10.033,29.845 8.382,29.845 8.001,29.464 8.001,26.416 8.001,13.97 9.017,12.954 9.525,12.446 14.732,12.446 27.178,12.446 30.861,16.129 31.369,16.637 35.687,16.637 39.116,16.637 45.085,10.668 45.593,10.16 50.038,10.16 50.927,10.16 52.197,11.43 52.451,11.684 52.451,13.081 52.451,13.716 51.816,14.351 51.181,14.986 46.736,14.986 45.085,14.986 41.148,18.923 40.767,19.304 34.417,19.304 22.733,19.304 19.939,16.51 18.415,14.986 15.875,14.986 14.097,14.986 12.954,16.129 12.446,16.637 12.446,29.464
GND on Bottom Layer "Bottom Layer-No Net" (solid, remove dead copper, pour order 12): 26.415,-11.753 57.501,-11.753 57.61,-11.644 57.728,-11.761 57.947,-11.761 58.399,-11.761 58.755,-11.405 60.415,-9.745 60.415,-9.5 60.415,-9.477 60.666,-9.226 60.971,-8.921 60.971,-8.089 60.971,-0.029 61,0 58.915,0 58.729,0.186 58.729,0.305 58.729,0.461 58.69,0.5 58.71,0.519 58.71,0.598 58.71,0.703 58.922,0.916 59.016,1.01 59.2,1.01 60.99,1.01 61,1 61,6.688 60.862,6.826 60.862,7.618 60.822,7.618 60.486,7.954 60.558,8.027 60.558,8.255 60.558,8.386 60.128,8.816 59.698,9.246 59.568,9.246 59.056,9.246 58.689,9.613 58.642,9.66 57.98,9.66 57.98,9.743 57.741,9.982 57.223,10.5 56.415,10.5 56.415,10.75 56.165,11 53.915,11 51.415,8.5 46.415,8.5 45.665,9.25 42.519,9.25 39.681,6.412 39.368,6.099 37.665,6.099 35.816,6.099 34.915,7 32.665,9.25 31.415,9.25 26.601,9.25 26.415,9.25

## Keep-outs
Keep-Out Layer:
  lines w0.013: 4.5,-12 cw(c4.5,-7.5) 0,-7.5 0,0 1.8,0 ccw(c1.8,0.5) 1.8,1 0,1 0,6.688 cw(c3,6.688) 2.143,9.563 ccw(c0,16.75) 7.5,16.75 7.5,20.25 ccw(c0,20.25) 2.143,27.437 cw(c3,30.312) 0,30.312 0,36 1.8,36 ccw(c1.8,36.5) 1.8,37 0,37 0,44.5 cw(c4.5,44.5) 4.5,49 56.5,49 cw(c56.5,44.5) 61,44.5 61,37 59.2,37 ccw(c59.2,36.5) 59.2,36 61,36 61,30.312 cw(c58,30.312) 58.857,27.437 ccw(c61,20.25) 53.5,20.25 53.5,16.75 ccw(c61,16.75) 58.857,9.563 cw(c58,6.688) 61,6.688 61,1 59.2,1 ccw(c59.2,0.5) 59.2,0 61,0 61,-7.5 cw(c56.5,-7.5) 56.5,-12
  lines w0.05: 4.5,-12 10.165,-12 54.996,-12 56.5,-12

## Silkscreen, mask and mechanical layers (free items; w line width, h text height)
Mechanical 1:
  drawing of 170 lines, arcs and shapes, not listed
Mechanical 2:
  circle w0.006: c10.049,18.503 r0.003
  circle w0.006: c8.005,-5.497 r0.003
  circle w0.006: c53.005,0.878 r0.003
  circle w0.006: c8.005,0.878 r0.003
  circle w0.006: c7.505,18.503 r0.003
  circle w0.006: c6.755,47.003 r0.003
  circle w0.006: c30.505,47.753 r0.003
  circle w0.006: c53.005,47.753 r0.003
  circle w0.006: c30.505,49.003 r0.003
  circle w0.006: c8.005,47.753 r0.003

## Text inside footprints (layer, text, board x,y; h text height)
C21: Bottom Overlay "+" at 31.12,32.152 h1.02 r270; Mechanical 5 "+" at 28.942,31.146 h1.02 r270
C23: Bottom Overlay "+" at 46.356,19.644 h0.89 r90
C24: Bottom Overlay "+" at 13.264,19.569 h1.5 r90; Mechanical 5 "+" at 15.55,20.751 h1.5 r90